# Altium PCB CSB01-TYPE_C-V1.0-2020-10-07.PcbDoc
Units mm, origin at the board's own origin, x right, y up, seen from the top; angles counter-clockwise.
Board outline 442.89 x 167.18 mm, 3 copper layers (Top Layer, Mid-Layer 1, Bottom Layer), stack 2.027 mm thick; 6 components, 517 nets, 49 pads, 56 vias.
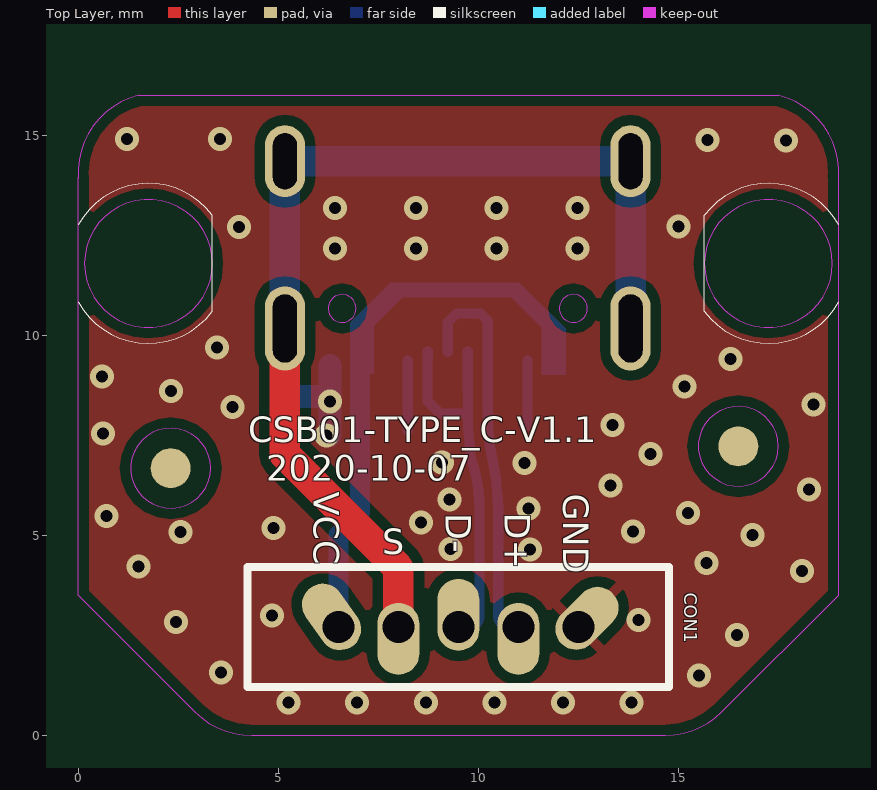
[diagram p0: Top Layer view]
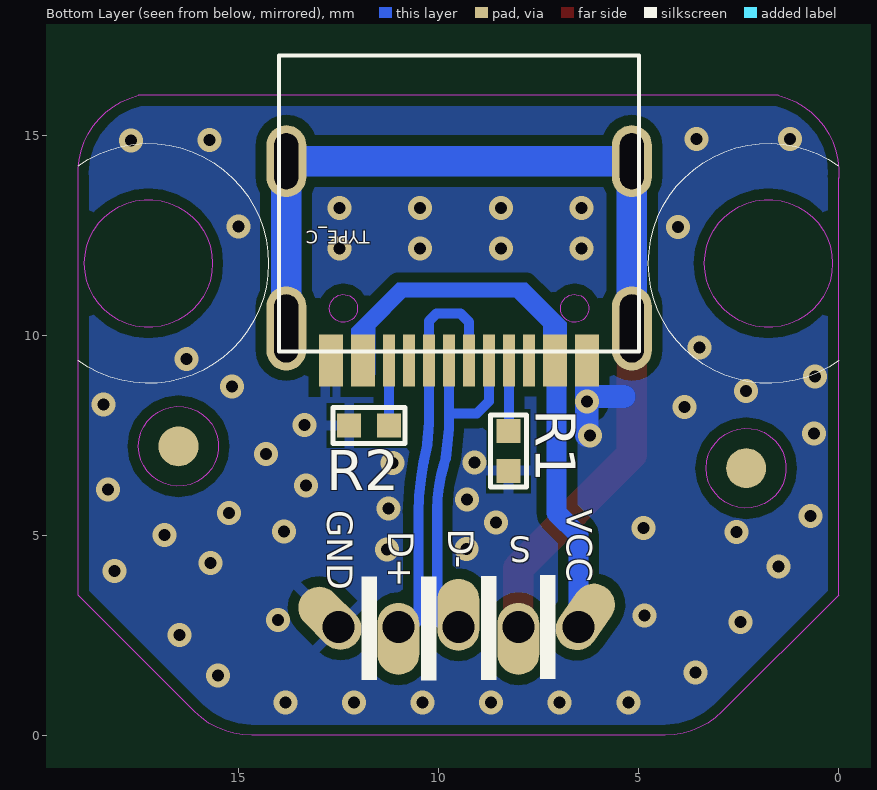
[diagram p1: Bottom Layer view, seen from below]

## Layer stack, top to bottom
Top Solder: solder mask 0.0102, Solder Resist, Dk 3.5
Top Layer: signal copper 0.0356
Dielectric 1: dielectric 1.6, FR-4, Dk 4.8
Mid-Layer 1: signal copper 0.0356
Dielectric2: dielectric 0.32, FR-4, Dk 4.8
Bottom Layer: signal copper 0.0356
Bottom Solder: solder mask 0.0102, Solder Resist, Dk 3.5

## Board outline
-8.021,-8.123 -8.021,159.057 434.864,159.057 434.864,-8.123

## Design rules (kind name [scope] priority, off if disabled: settings)
Clearance [All] p1: gap=0.254
ComponentClearance [All] p1 off: gap=0.254 collisioncheckmode=3 verticalgap=0.254 showdistances=FALSE
DiffPairsRouting [All] p1: maxlimit=0.25 minlimit=0.25 mostfreqgap=0.25 toplayer_minwidth=0.25 toplayer_maxwidth=0.25 toplayer_prefwidth=0.25 midlayer1_minwidth=0.25 midlayer1_maxwidth=0.25 midlayer1_prefwidth=0.25 bottomlayer_minwidth=0.25 bottomlayer_maxwidth=0.25 bottomlayer_prefwidth=0.25 maxuncoupledlength=12.7
PlaneClearance [All] p1: clearance=0.5
PolygonConnect PolygonConnect_1 [ISVIA] p1: connectstyle=Direct reliefconductorwidth=0.254 reliefentries=4 polygonreliefangle="90 Angle" airgapwidth=0.254
PolygonConnect [All] p2: connectstyle=Relief reliefconductorwidth=0.254 reliefentries=4 polygonreliefangle="90 Angle" airgapwidth=0.254
RoutingVias [All] p1: holewidth=0.4 width=0.6 viastyle="Through Hole" minholewidth=0.4 minwidth=0.6 maxholewidth=0.4 maxwidth=0.6
SolderMaskExpansion [All] p1: expansion=0.102
Width [All] p1: maxlimit=2 minlimit=0.2 preferedwidth=0.25
26 further rules are at their usual default settings.

## Classes and differential pairs
component class WT6576F方案V1.0_Main: CN1
differential pair NewDifferentialPair2: +D- -D+
differential pair NewDifferentialPair1: +NetCONA1_3 -NetCONA1_4

## Components (designator, comment, footprint, x,y, rotation, side; value= is the part's Value field where it differs from the comment)
CON1 "USB5P" USB5P 9.504,2.715 r90 top locked
R1 "5.1K" R0402 8.251,7.112 r270 bottom
R2 "5.1K" R0402 11.738,7.746 r0 bottom
TYPE_C "TYPE-C-F-1(16PIN)" TYPE-C-F-1(16PIN) 9.487,9.591 r90 bottom locked
? "Comment" Mark点 2.311,6.68 r0 top
? "Comment" Mark点 16.502,7.228 r0 top

## Footprints (in the part's own frame and the unit in brackets; to place one, negate y for a bottom-side part, rotate by r counter-clockwise, add the part's x,y. Pads: shape width x height; smd on the part's side, far side on the other; paste and mask are expansions set on the pad)
Mark点 [mm]
  round 1 smd far side: 0(0,0)
  round 1 smd: 0(0,0)
  round 2 on Top Solder: 0(0,0)
  round 2 on Bottom Solder: 0(0,0)
  Keep-Out Layer circle w0.013: c0,0 r1
R0402 [mm]
  rect 0.6x0.6 smd: 1(-0.5,0) 2(0.5,0)
  silkscreen extent -0.9,-0.45 0.9,0.45
TYPE-C-F-1(16PIN) [mm]
  rect 1.3x0.3 smd: A1(-0.216,-3.35) A4(-0.216,-2.55) A5(-0.216,-1.25) A6(-0.216,-0.25) A7(-0.216,0.25) A8(-0.216,1.25) A9(-0.216,2.55) A12(-0.216,3.35) B1(-0.216,3.05) B4(-0.216,2.25) B5(-0.216,1.75) B6(-0.216,0.75) B7(-0.216,-0.75) B8(-0.216,-1.75) B9(-0.216,-2.25) B12(-0.216,-3.05)
  oval 2.1x1 hole 0.6 slot 1.7 at 0 deg: C1(0.583,4.32) C2(0.583,-4.32)
  oval 1.8x1 hole 0.6 slot 1.4 at 0 deg: C5(4.763,4.32) C6(4.763,-4.32)
  silkscreen extent 0,-4.5 7.4,4.5
USB5P [mm]
  oval 1.8x1.05 hole 0.8 copper offset 0.212,-0.212 rot 135: 5(0,-3)
  oval 1.8x1.05 hole 0.8 copper offset -0.3,0: 6(0,1.5) 9(0,-1.5)
  oval 1.8x1.05 hole 0.8 copper offset 0.246,0.172 rot 35: 7(0,3)
  oval 1.8x1.05 hole 0.8 copper offset 0.3,0: 8(0,0)
  silkscreen extent -1.5,-5.27 1.5,5.27

## Free pads (board coordinates)
  round 0.025 on Mech1: 1(0,10.839) 1(0,12.761) 1(2.918,0.586) 1(2.918,0.586) 1(2.918,0.586) 1(14.676,0) 1(14.676,0) 1(16.09,0.586) 1(16.09,0.586) 1(19.006,14.235) 1(19.008,10.839) 1(19.008,12.761)

## Via types
v1: diameter 0.6, hole 0.3, Top Layer to Bottom Layer, tented both sides, 56 vias

## Nets (pads, with @x,y where several pads share a name; then routed paths per layer and width w, separated by ;. In a path a pad name is that pad's centre, name@x,y a point inside that pad or via, vN(x,y) a via of type N, cw(c..) or ccw(c..) an arc to the next point about the centre after c; other vN are vias at no path point)
2: 
3: 
4: 
A1: 
A2: 
A3: 
A4: 
A5: R1.1 TYPE_C.A5 | length 1.7
  Bottom Layer w0.254: R1.1@8.237,7.627 TYPE_C.A5
B5: R2.1 TYPE_C.B5 | length 1.6
  Bottom Layer w0.25: R2.1 TYPE_C.B5
BL0: 
BL1: 
BL2: 
BL3: 
BL4: 
BL5: 
CAPLED: 
CAPVCC: 
CB10: 
CB11: 
CB12: 
CB13: 
CB14: 
CB15: 
CB16: 
CB17: 
CB18: 
CB19: 
CB20: 
CBL0: 
CBL1: 
CBL2: 
CBL3: 
CBL4: 
CBL5: 
CBL6: 
CBL7: 
CBL8: 
CBL9: 
CC1: 
CL0: 
CL1: 
CL2: 
CL3: 
CL4: 
CL5: 
CL6: 
CL7: 
CL8: 
CL9: 
CL10: 
CL11: 
CL12: 
CL13: 
CL14: 
CL15: 
CL16: 
CL17: 
CL18: 
CL19: 
CL20: 
CL21: 
COL1: 
COL2: 
COL3: 
COL4: 
COL5: 
COL6: 
COL7: 
COL8: 
COL9: 
COL10: 
COL11: 
COL12: 
COL13: 
COL14: 
COL15: 
D+: CON1.9 TYPE_C.A6 TYPE_C.B6 | length 10
  Bottom Layer w0.254: TYPE_C.A6@9.237,9.591 9.237,10.329 9.459,10.55 10.049,10.55 10.237,10.362 10.237,9.591 10.237,7.816 10.283,7.28 10.373,6.832 cw(c4.001,5.552) 10.5,5.552 10.5,2.977 ccw(c10.762,2.977) 10.762,2.715 CON1.9
D+/CLK: 
D+_1: 
D-: CON1.8 TYPE_C.A7 TYPE_C.B7 | length 9.7
  Bottom Layer w0.25: TYPE_C.B7 8.737,8.353 9.039,8.051 9.725,8.051
  Bottom Layer w0.254: TYPE_C.B7 TYPE_C.B7@8.737,9.591 ; CON1.8 9.768,2.715 ccw(c9.768,2.982) 10.035,2.982 10.035,5.644 ccw(c6.153,5.644) 9.868,6.771 9.822,6.923 9.741,7.664 9.741,8.439 9.737,8.695 TYPE_C.A7@9.737,9.591
D-/DATA: 
D-_1: 
EB: 
EG: 
ER: 
GND: CON1.5 R1.2 R2.2 TYPE_C.A1 TYPE_C.A12 TYPE_C.B1 TYPE_C.B12 | length 2.6
  Bottom Layer w0.584: 5.368,8.471 v1@6.264,8.471 ; v1@6.294,7.504 TYPE_C.B12@6.294,9.238
  other v1: 5.258,0.82 6.973,0.82 8.688,0.82 10.402,0.82 12.117,0.82 13.832,0.82 15.518,1.502 3.572,1.569 16.472,2.506 2.449,2.84 14.008,2.886 4.847,2.998 18.096,4.109 1.501,4.223 15.708,4.313 9.305,4.655 11.296,4.645 16.857,5.015 2.553,5.08 13.867,5.096 4.875,5.188 8.57,5.32 0.704,5.48 15.238,5.565 11.255,5.678 9.286,5.894 18.27,6.147 13.312,6.245 9.097,6.823 11.156,6.811 14.309,7.034 6.212,7.499 0.621,7.549 13.352,7.76 3.85,8.209 18.379,8.277 6.294,8.342 2.321,8.611 15.16,8.721 0.593,8.97 16.302,9.407 3.472,9.695 6.423,12.168 8.442,12.168 10.462,12.168 12.481,12.168 4.017,12.708 15,12.728 6.423,13.181 8.442,13.181 10.462,13.181 12.481,13.181 17.694,14.869 15.73,14.884 1.218,14.912 3.55,14.912
GR0: 
GR1: 
GR2: 
GR3: 
GR4: 
GR5: 
IIC_SCL: 
IIC_SDA: 
IRR1: 
IRR2: 
IRR3: 
IRR4: 
IRR5: 
IRR6: 
IRR7: 
IRR8: 
K_CIRCLE_MODE: 
K_MUTE: 
K_ON/OFF_LED: 
K_PAD_CIRCLE_MODE: 
LB0: 
LB1: 
LB2: 
LB3: 
LB4: 
LB5: 
LED1: 
LED2: 
LED3: 
LED4: 
LED_SDB: 
LEDA1: 
LEDA2: 
LEDA3: 
LEDA4: 
LG0: 
LG1: 
LG2: 
LG3: 
LG4: 
LG5: 
LR0: 
LR1: 
LR2: 
LR3: 
LR4: 
LR5: 
LRB0: 
LRG0: 
LRR0: 
MCUVDD: 
NetCA1_1: 
NetCA4_1: 
NetCA11_1: 
NetCONA1_2: 
NetCONA1_3: 
NetCONA1_4: 
NetCONA1_5: 
NetIR1_1: 
NetIR1_2: 
NetIR2_2: 
NetIR3_2: 
NetIR4_2: 
NetIR5_2: 
NetIR6_2: 
NetIR7_2: 
NetIR8_2: 
NetIR9_2: 
NetIR10_2: 
NetIR11_2: 
NetIR12_2: 
NetIR13_2: 
NetIR14_2: 
NetIR15_2: 
NetIR16_1: 
NetIR31_1: 
NetIR46_1: 
NetIR61_1: 
NetIR76_1: 
NetIR91_1: 
NetIR100_1: 
NetKB1_1: 
NetKB2_1: 
NetKB3_1: 
NetKB4_1: 
NetLED1_A: 
NetLED1_K: 
NetLED2_K: 
NetLED3_K: 
NetLED4_K: 
NetLED5_K: 
NetLED6_K: 
NetLED7_K: 
NetLED8_K: 
NetLED9_K: 
NetLED10_K: 
NetLED11_K: 
NetLED12_K: 
NetLED13_K: 
NetLED14_K: 
NetLED15_K: 
NetLED16_A: 
NetLED31_A: 
NetLED46_A: 
NetLED61_A: 
NetLED76_A: 
NetLED91_A: 
NetLED100_A: 
NetLED108_2: 
NetLED109_2: 
NetLED110_2: 
NetLED111_2: 
NetLED112_1: 
NetLED112_2: 
NetLED112_3: 
NetLED113_VDD: 
NetLED117_2: 
NetQ1_B: 
NetQ2_B: 
NetQ3_B: 
NetQ4_B: 
NetQ5_B: 
NetQ6_B: 
NetQ7_B: 
NetQ8_B: 
NetQ9_B: 
NetQ10_B: 
NetQ11_B: 
NetQ12_B: 
NetQ13_B: 
NetQ14_B: 
NetQ15_B: 
NetQ16_B: 
NetQ16_C: 
NetQ17_B: 
NetQ17_C: 
NetQ18_B: 
NetQ18_C: 
NetQ19_B: 
NetQ19_C: 
NetQ20_B: 
NetQ20_C: 
NetQ21_B: 
NetQ21_C: 
NetQ22_B: 
NetQ22_C: 
NetQ23_B: 
NetQ23_C: 
NetQ24_B: 
NetQ25_B: 
NetQ26_B: 
NetQ27_B: 
NetQ28_B: 
NetQ29_B: 
NetQ30_B: 
NetQ31_B: 
NetQ32_B: 
NetQ33_B: 
NetQ34_B: 
NetQ35_B: 
NetQ36_B: 
NetQ37_B: 
NetQ38_B: 
NetQ39_B: 
NetQ39_C: 
NetQ40_B: 
NetQ40_C: 
NetQ41_B: 
NetQ41_C: 
NetQ42_B: 
NetQ42_C: 
NetR19_1: 
NetR30_2: 
NetRA1_1: 
NetRB1_2: 
NetRB2_2: 
NetRB3_2: 
NetRB4_2: 
NetRC1_2: 
NetRC2_2: 
NetRC3_2: 
NetRC4_2: 
NetRC5_2: 
NetRC6_2: 
NetRC7_2: 
NetRC8_2: 
NetRC9_2: 
NetRC10_2: 
NetRC11_2: 
NetRC12_2: 
NetRC13_2: 
NetRC14_2: 
NetRC15_2: 
NetRC16_2: 
NetRC17_2: 
NetRL1_2: 
NetRL2_2: 
NetRL3_2: 
NetRL4_2: 
NetRL5_2: 
NetRL6_2: 
NetRL7_2: 
NetRL8_2: 
NetRL9_2: 
NetRL10_2: 
NetRL11_2: 
NetRL12_2: 
NetRL13_2: 
NetRL14_2: 
NetRL15_2: 
NetRL16_2: 
NetRL17_2: 
NetRL18_2: 
NetRL19_2: 
NetRL20_2: 
NetRL21_2: 
NetRL22_2: 
NetRL23_2: 
NetRL24_2: 
NetRL25_2: 
NetRL26_2: 
NetRL27_2: 
NetRL28_2: 
NetRL29_2: 
NetRL30_2: 
NetRL31_2: 
NetRL32_2: 
NetRL33_2: 
NetRL34_2: 
NetRL35_2: 
NetRL36_2: 
NetRL37_2: 
NetRL38_2: 
NetRL39_2: 
NetRR1_1: 
NetRR2_1: 
NetRR3_1: 
NetRR4_1: 
NetRR5_1: 
NetRR6_1: 
NetRR7_1: 
NetRR8_1: 
NetRR9_1: 
NetRR10_1: 
NetRR11_1: 
NetRR12_1: 
NetRR13_1: 
NetRR14_1: 
NetRR15_1: 
NetRR16_1: 
NetRR17_1: 
NetRR18_1: 
NetSW1_2: 
NetSW2_2: 
NetSW3_2: 
NetSW4_2: 
NetSW5_2: 
NetSW6_2: 
NetSW7_2: 
NetSW8_2: 
NetSW9_2: 
NetSW10_2: 
NetSW11_2: 
NetSW12_2: 
NetSW13_2: 
NetSW14_2: 
NetSW15_2: 
NetSW16_2: 
NetSW17_2: 
NetSW18_2: 
NetSW19_2: 
NetSW20_2: 
NetSW21_2: 
NetSW22_2: 
NetSW23_2: 
NetSW24_2: 
NetSW25_2: 
NetSW26_2: 
NetSW27_2: 
NetSW28_2: 
NetSW29_2: 
NetSW30_2: 
NetSW31_2: 
NetSW32_2: 
NetSW33_2: 
NetSW34_2: 
NetSW35_2: 
NetSW36_2: 
NetSW37_2: 
NetSW38_2: 
NetSW39_2: 
NetSW40_2: 
NetSW41_2: 
NetSW42_2: 
NetSW43_2: 
NetSW44_2: 
NetSW45_2: 
NetSW46_2: 
NetSW47_2: 
NetSW48_2: 
NetSW49_2: 
NetSW50_2: 
NetSW51_2: 
NetSW52_2: 
NetSW53_2: 
NetSW54_2: 
NetSW55_2: 
NetSW56_2: 
NetSW57_2: 
NetSW58_2: 
NetSW59_2: 
NetSW60_2: 
NetSW61_2: 
NetSW62_2: 
NetSW63_2: 
NetSW64_2: 
NetSW65_2: 
NetSW66_2: 
NetSW67_2: 
NetSW68_2: 
NetSW69_2: 
NetSW70_2: 
NetSW71_2: 
NetSW72_2: 
NetSW73_2: 
NetSW74_2: 
NetSW75_2: 
NetSW76_2: 
NetSW77_2: 
NetSW78_2: 
NetSW79_2: 
NetSW80_2: 
NetSW81_2: 
NetSW82_2: 
NetSW83_2: 
NetSW84_2: 
NetSW85_2: 
NetSW86_2: 
NetSW87_2: 
NetSW88_2: 
NetSW89_2: 
NetSW90_2: 
NetSW91_2: 
NetSW92_2: 
NetSW93_2: 
NetSW94_2: 
NetSW95_2: 
NetSW96_2: 
NetSW97_2: 
NetSW98_2: 
NetSW99_2: 
NetSW100_2: 
NetSW101_2: 
NetSW102_2: 
NetSW103_2: 
NetSW104_2: 
NetSW105_2: 
NetSW106_2: 
NetU1_1: 
NetU4_16: 
NUMLED: 
NUNVCC: 
R0: 
R1: 
R2: 
R3: 
R4: 
R5: 
RED0: 
RED1: 
RED2: 
RED3: 
RED4: 
RED5: 
REST: 
RR0: 
S: CON1.6 TYPE_C.C1 TYPE_C.C2 TYPE_C.C5 TYPE_C.C6 | length 25.6
  Top Layer w0.762: TYPE_C.C2 5.167,7.02 8.004,4.183 CON1.6
  Bottom Layer w0.762: TYPE_C.C2 TYPE_C.C6 TYPE_C.C5 TYPE_C.C1
SCL: 
SCRLED: 
SCRVCC: 
SDA: 
SG: 
SG1: 
SW1: 
SW2: 
SW3: 
SW4: 
SW5: 
SW6: 
SW7: 
SW8: 
TPQ0: 
TPQ0': 
TPQ1: 
TPQ1': 
TPQ2: 
TPQ2': 
TPQ3: 
TPQ3': 
TVDD: 
U4_CA1: 
U4_CA2: 
U4_CA3: 
U4_CA4: 
U4_CA5: 
U4_CA6: 
U4_CA7: 
U4_CA8: 
U4_CA9: 
U4_CB1: 
U4_CB2: 
U4_CB3: 
U4_CB4: 
U4_CB5: 
U4_CB6: 
U4_CB7: 
U4_CB8: 
USB5V: 
"USB D+": 
"USB D-": 
VCC: CON1.7 TYPE_C.A4 TYPE_C.A9 TYPE_C.B4 TYPE_C.B9 | length 15.5
  Bottom Layer w0.254: TYPE_C.A4@6.937,9.591 7.048,9.702 TYPE_C.B9@7.253,9.907 ; TYPE_C.B9@7.237,9.591 7.253,9.607 TYPE_C.B9@7.253,9.907 ; TYPE_C.B4@11.737,9.591 11.722,9.607 TYPE_C.B4@11.722,9.907 ; TYPE_C.A9@12.037,9.591 TYPE_C.B4@11.722,9.907 ; TYPE_C.B9@7.253,9.907 7.253,10.27 7.255,10.272 ; TYPE_C.B9@7.253,9.907 7.255,9.909 7.255,10.272 ; 7.255,10.272 7.287,10.304 7.287,10.305 ; 7.255,10.272 7.255,10.274 7.287,10.305 ; 7.287,10.305 7.287,10.332 8.077,11.123 10.898,11.123 11.688,10.332 11.688,10.305 ; 11.688,10.305 11.688,10.304 11.719,10.272 ; 11.688,10.305 11.719,10.274 11.719,10.272 ; 11.719,10.272 11.719,9.909 TYPE_C.B4@11.722,9.907 ; 11.719,10.272 11.722,10.27 TYPE_C.B4@11.722,9.907
  Bottom Layer w0.5: CON1.7 6.504,4.071 6.504,5.011 7.048,5.555 TYPE_C.A4@7.048,9.702
VCC5V: 
VCC_5V: 
VDD: 
VDD-1: 
VDD_1: 
VREG33: 
WINLED: 
WINVCC: 
ZA: 
ZB: 
pads on no net: ?.0 TYPE_C.A8 TYPE_C.B8

## Polygon pours and split planes (outlines as drawn)
GND on Top Layer "Top Layer-No Net 1" (solid, remove dead copper, pour order 4): -0.363,16.541 19.334,16.541 19.334,-0.158 19.305,-0.187 -0.334,-0.187 -0.363,-0.215 -0.363,16.541 -0.361,16.543
GND on Bottom Layer "Top Layer-No Net 1" (solid, remove dead copper, pour order 3): -0.363,16.541 19.334,16.541 19.334,-0.158 19.305,-0.187 -0.334,-0.187 -0.363,-0.215 -0.363,16.541 -0.361,16.543

## Keep-outs
Keep-Out Layer:
  circle w0.025: c1.754,11.801 r1.6
  circle w0.025: c17.254,11.8 r1.6
  circle w0.025: c6.597,10.674 r0.35
  circle w0.025: c12.377,10.674 r0.35
  lines w0.025: 0,13.934 cw(c1.986,14.069) 1.504,16 17.504,16 cw(c17.023,14.069) 19.008,13.934 ; 0,13.935 0,3.504 2.918,0.586 ccw(c4.333,2) 4.333,0 14.676,0 ccw(c14.676,2) 16.09,0.586 19.008,3.504 19.008,13.935

## Other copper
Top Layer:
Bottom Layer:
  region net VCC: 7.388,9.046 7.388,10.226 8.114,10.953 10.829,10.953 11.587,10.195 11.587,9.016 12.185,9.016 12.185,10.162 11.028,11.32 7.798,11.32 6.794,10.316 6.794,9.046 7.388,9.046

## Silkscreen, mask and mechanical layers (free items; w line width, h text height)
Top Overlay:
  lines w0.025: 0,10.84 ccw(c1.754,11.8) 3.354,10.599 ; 0,12.76 cw(c1.754,11.8) 3.354,13.001 3.354,10.6 ; 15.654,10.6 15.654,13 ; 15.655,10.599 ccw(c17.254,11.8) 19.008,10.84 ; 15.655,13.001 cw(c17.254,11.8) 19.008,12.76
  text "CSB01-TYPE_C-V1.1" at 4.252,7.334 h0.64
  text "2020-10-07" at 4.706,6.368 h0.64
  text "VCC" at 5.884,6.088 h0.64 r270
  text "GND" at 12.123,6.046 h0.64 r270
  text "D+" at 10.668,5.561 h0.64 r270
  text "D-" at 9.193,5.55 h0.64 r270
  text "S" at 7.601,4.528 h0.64
Bottom Overlay:
  rectangle: 11.539,1.378 11.926,3.977
  rectangle: 10.053,1.369 10.439,3.968
  rectangle: 8.554,1.388 8.941,3.987
  rectangle: 7.075,1.408 7.461,4.006
  lines w0.025: 19.005,14.236 ccw(c17.254,11.8) 19.009,9.367 ; -0.001,9.367 ccw(c1.754,11.8) 0.004,14.236 cw(c1.754,11.8) -0.001,9.367
  text "VCC" at 6.796,5.656 h0.64 r90
  text "GND" at 12.785,5.623 h0.64 r90
  text "D-" at 9.757,5.168 h0.64 r90
  text "D+" at 11.254,5.101 h0.64 r90
  text "S" at 7.687,4.966 h0.64 r180
Mechanical 1:
  circle w0.025: c1.754,11.8 r1.6
  circle w0.025: c17.254,11.8 r1.6
  circle w0.025: c6.597,10.674 r0.35
  circle w0.025: c12.377,10.674 r0.35
  lines w0.025: 0,13.934 cw(c1.986,14.069) 1.504,16 17.504,16 cw(c17.023,14.069) 19.008,13.934 ; 0,13.935 0,3.504 2.918,0.586 ccw(c4.333,2) 4.333,0 14.676,0 ccw(c14.676,2) 16.09,0.586 19.008,3.504 19.008,13.935
Mechanical 103:
  circle w0.025: c9.504,2.715 r0.5
  circle w0.025: c13.504,2.715 r0.5
  circle w0.025: c7.504,2.715 r0.5
  circle w0.025: c5.504,2.715 r0.5
  circle w0.025: c11.504,2.715 r0.5
  circle w0.025: c11.904,2.715 r0.5
  circle w0.025: c9.504,2.715 r0.5
  circle w0.025: c7.104,2.715 r0.5
  circle w0.025: c8.304,2.715 r0.5
  circle w0.025: c10.704,2.715 r0.5
  lines w0.025: 0.09,3.414 2.918,0.586 ccw(c4.333,2) 4.333,0 14.676,0 ccw(c14.676,2) 16.09,0.586 18.918,3.414 ; 5.029,11.346 5.029,10.15 ; 5.029,13.754 5.029,15.046 ; 5.029,16 5.029,17 ; 5.413,10.15 5.029,10.15 ; 6.329,10.15 6.329,17 6.329,16 ; 12.679,10.15 12.679,17 12.679,16 ; 13.595,10.15 13.979,10.15 ; 13.979,11.346 13.979,10.15 ; 13.979,13.754 13.979,15.046 ; 13.979,16 13.979,17 ; 4.934,10.25 ccw(c5.184,10.25) 5.434,10.25 ; 4.934,10.25 ccw(c5.184,10.25) 5.434,10.25 ; 4.934,10.25 4.934,11.15 ; 4.934,10.25 4.934,11.15 ; 4.934,11.15 cw(c5.184,11.15) 5.434,11.15 ; 4.934,11.15 cw(c5.184,11.15) 5.434,11.15 ; 4.934,13.95 ccw(c5.184,13.95) 5.434,13.95 ; 4.934,13.95 ccw(c5.184,13.95) 5.434,13.95 ; 4.934,13.95 4.934,14.85 ; 4.934,13.95 4.934,14.85 ; 4.934,14.85 cw(c5.184,14.85) 5.434,14.85 ; 4.934,14.85 cw(c5.184,14.85) 5.434,14.85 ; 5.029,10.15 5.029,17 ; 5.029,10.15 13.979,10.15 ; 5.029,17 13.979,17 ; 5.029,17 13.979,17 ; 5.434,10.25 5.434,11.15 ; 5.434,10.25 5.434,11.15 ; 5.434,13.95 5.434,14.85 ; 5.434,13.95 5.434,14.85 ; 13.574,10.25 ccw(c13.824,10.25) 14.074,10.25 ; 13.574,10.25 ccw(c13.824,10.25) 14.074,10.25 ; 13.574,10.25 13.574,11.15 ; 13.574,10.25 13.574,11.15 ; 13.574,11.15 cw(c13.824,11.15) 14.074,11.15 ; 13.574,11.15 cw(c13.824,11.15) 14.074,11.15 ; 13.574,13.95 ccw(c13.824,13.95) 14.074,13.95 ; 13.574,13.95 ccw(c13.824,13.95) 14.074,13.95 ; 13.574,13.95 13.574,14.85 ; 13.574,13.95 13.574,14.85 ; 13.574,14.85 cw(c13.824,14.85) 14.074,14.85 ; 13.574,14.85 cw(c13.824,14.85) 14.074,14.85 ; 13.979,10.15 13.979,17 ; 14.074,10.25 14.074,11.15 ; 14.074,10.25 14.074,11.15 ; 14.074,13.95 14.074,14.85 ; 14.074,13.95 14.074,14.85 ; 6.231,0.887 12.646,0.887 12.646,3.949 6.231,3.949 6.231,0.887